# EAGLE board VL6180_Breakout-Panel-v10 (EAGLE 6.5.0), part 1 of 3
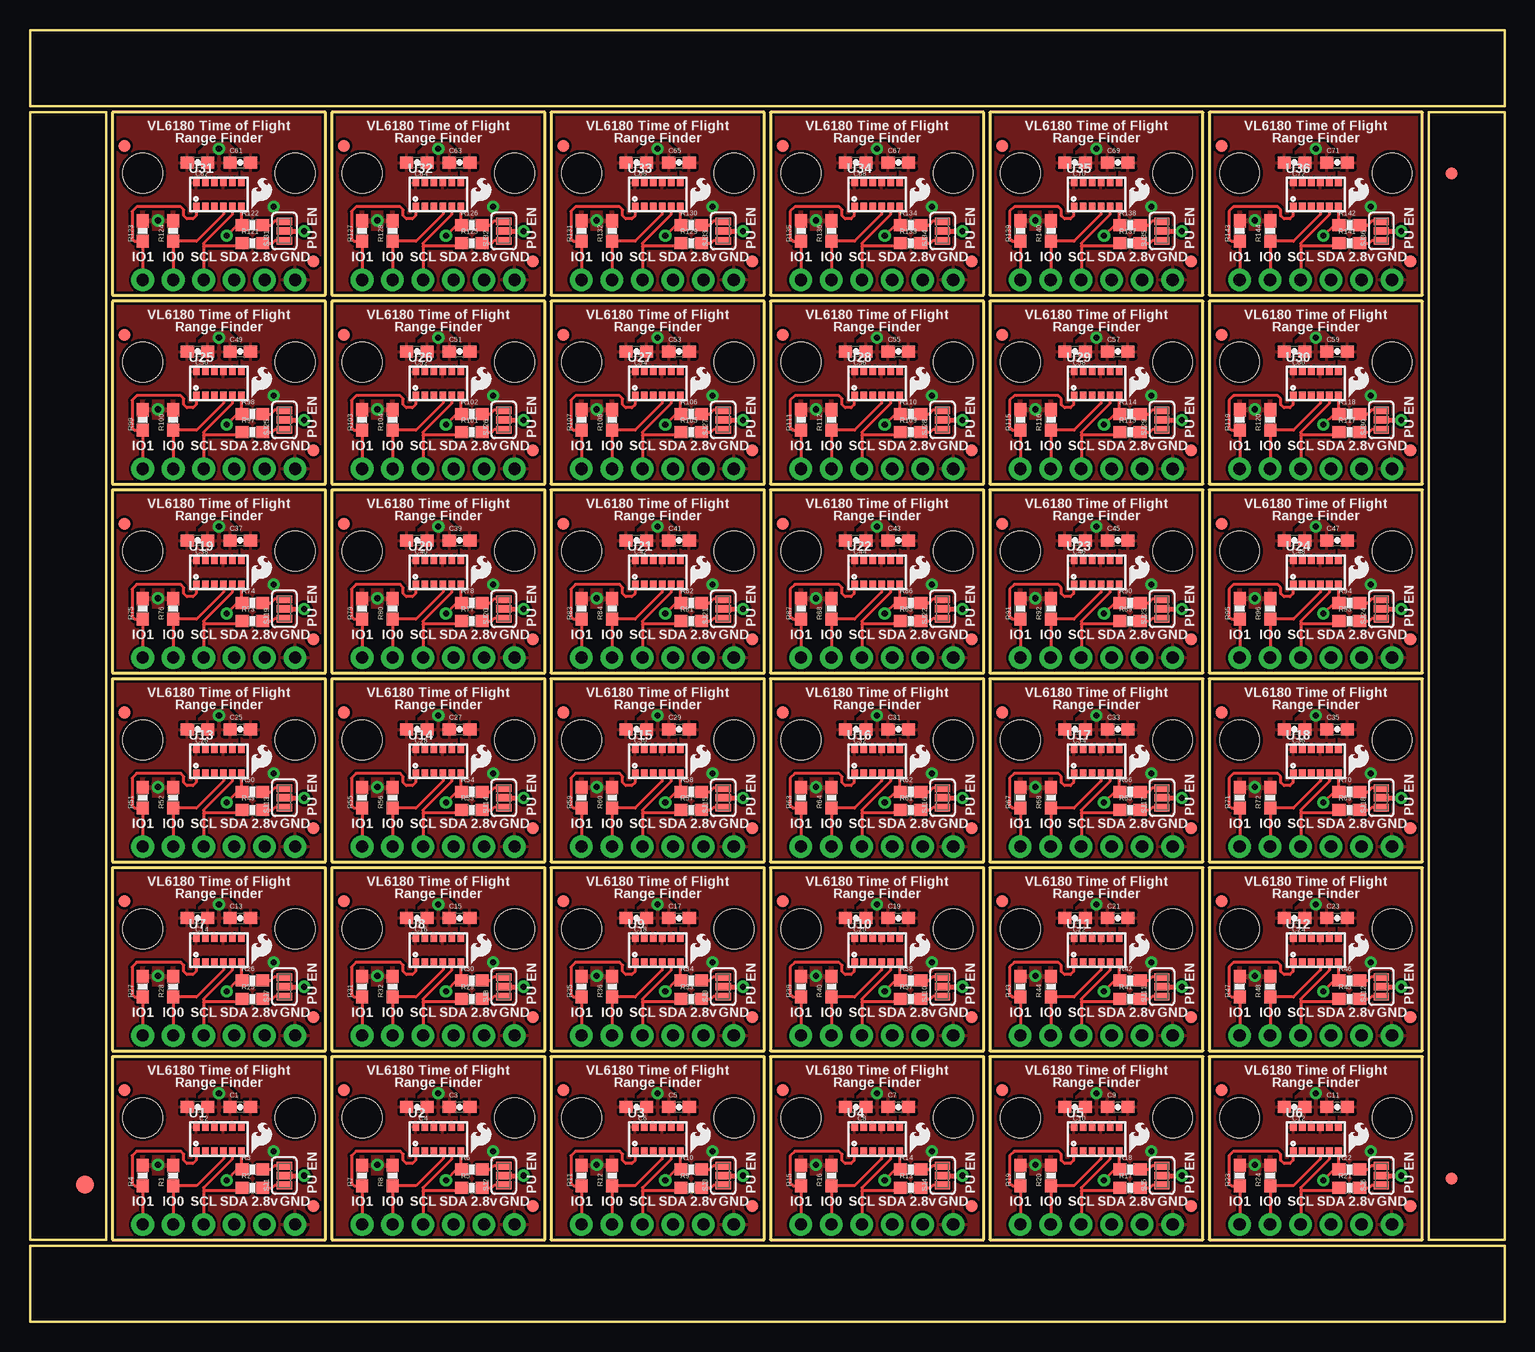
[diagram p0: board, top side]
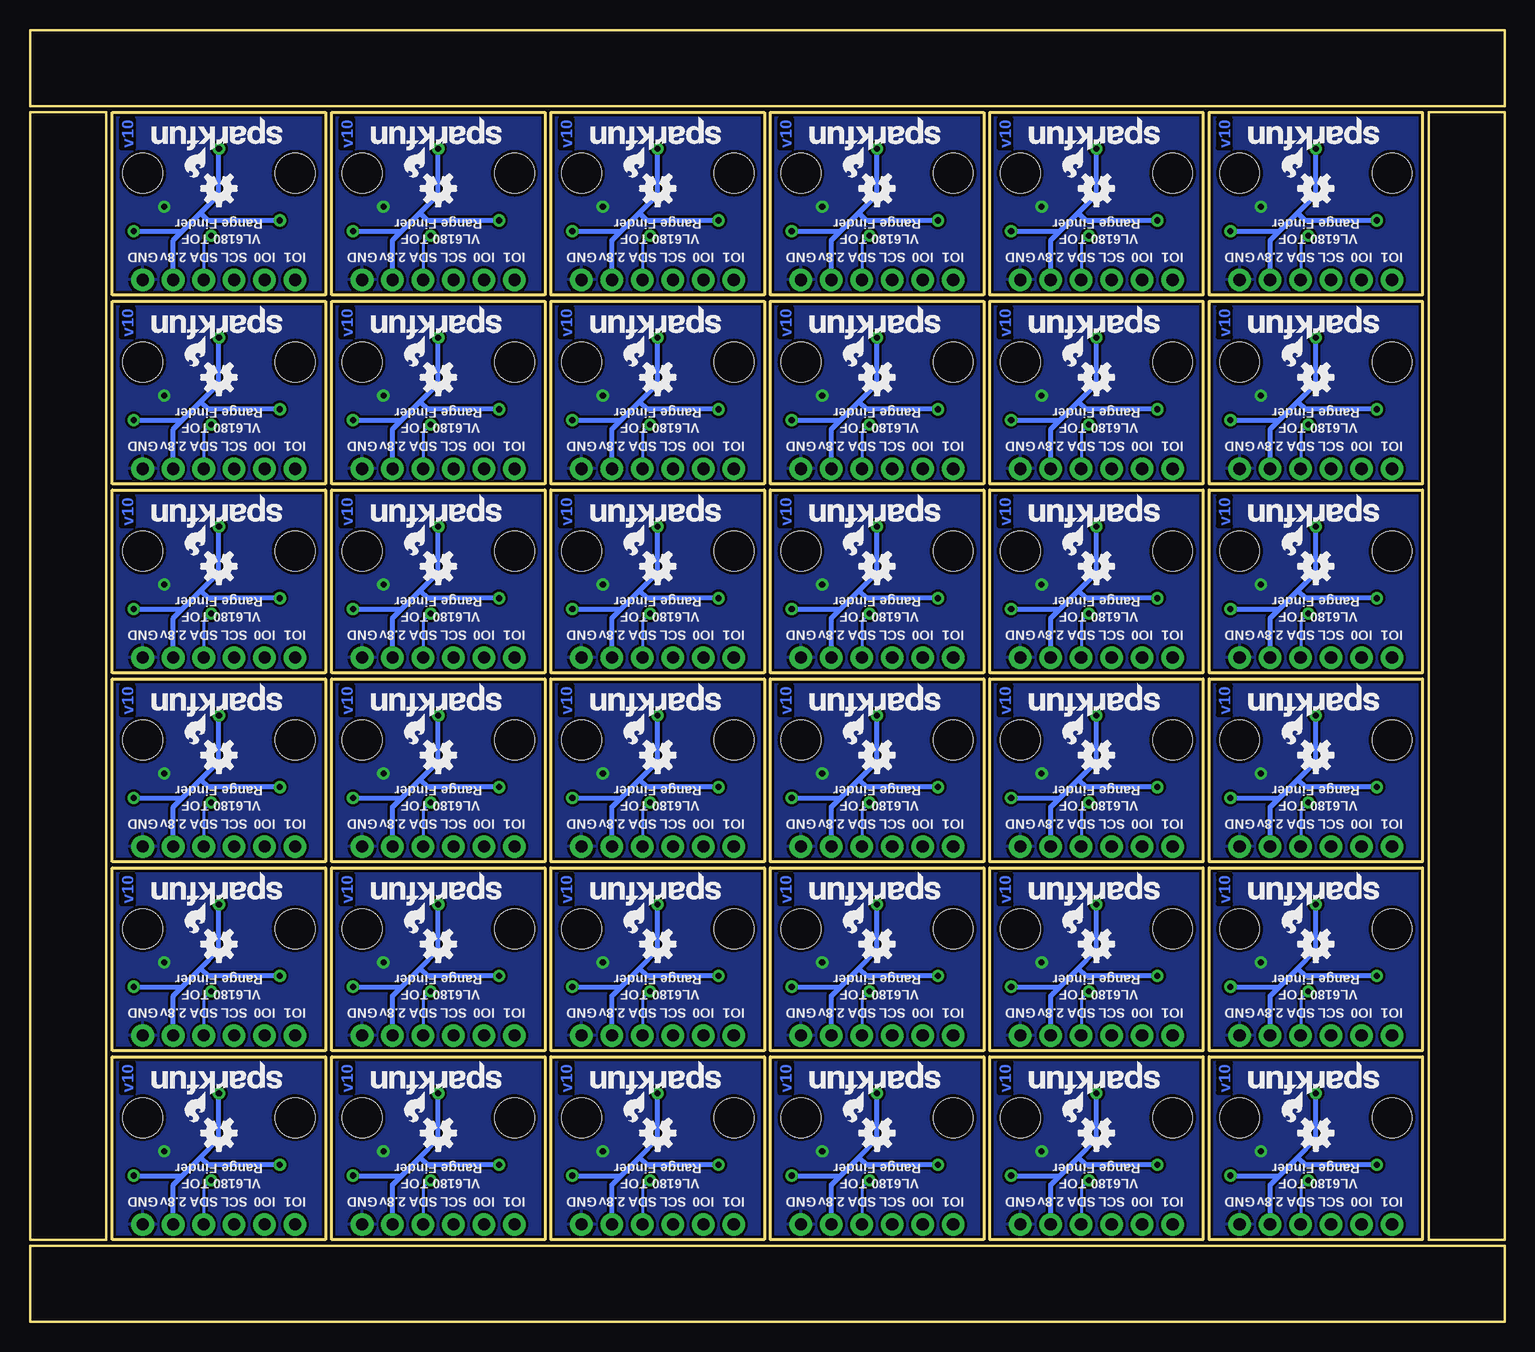
[diagram p1: board, bottom side, seen from below]

Size 122.94 x 107.7 mm. Coordinates in mm from the lower left corner, seen from the top.
Outline: 6.35,79.25 6.35,6.86 0,6.86 0,29.72
Outline: 122.94,79.25 122.94,6.86 116.59,6.86 116.59,29.72
Outline: 116.59,28.45 116.59,100.84 122.94,100.84 122.94,77.98
Outline: 0,28.45 0,100.84 6.35,100.84 6.35,77.98
Outline: 6.86,6.86 24.64,6.86 24.64,22.1 6.86,22.1 6.86,6.86
Outline: 25.15,6.86 42.93,6.86 42.93,22.1 25.15,22.1 25.15,6.86
Outline: 43.43,6.86 61.21,6.86 61.21,22.1 43.43,22.1 43.43,6.86
Outline: 61.72,6.86 79.5,6.86 79.5,22.1 61.72,22.1 61.72,6.86
Outline: 80.01,6.86 97.79,6.86 97.79,22.1 80.01,22.1 80.01,6.86
Outline: 98.3,6.86 116.08,6.86 116.08,22.1 98.3,22.1 98.3,6.86
Outline: 6.86,22.61 24.64,22.61 24.64,37.85 6.86,37.85 6.86,22.61
Outline: 25.15,22.61 42.93,22.61 42.93,37.85 25.15,37.85 25.15,22.61
Outline: 43.43,22.61 61.21,22.61 61.21,37.85 43.43,37.85 43.43,22.61
Outline: 61.72,22.61 79.5,22.61 79.5,37.85 61.72,37.85 61.72,22.61
Outline: 80.01,22.61 97.79,22.61 97.79,37.85 80.01,37.85 80.01,22.61
Outline: 98.3,22.61 116.08,22.61 116.08,37.85 98.3,37.85 98.3,22.61
Outline: 6.86,38.35 24.64,38.35 24.64,53.59 6.86,53.59 6.86,38.35
Outline: 25.15,38.35 42.93,38.35 42.93,53.59 25.15,53.59 25.15,38.35
Outline: 43.43,38.35 61.21,38.35 61.21,53.59 43.43,53.59 43.43,38.35
Outline: 61.72,38.35 79.5,38.35 79.5,53.59 61.72,53.59 61.72,38.35
Outline: 80.01,38.35 97.79,38.35 97.79,53.59 80.01,53.59 80.01,38.35
Outline: 98.3,38.35 116.08,38.35 116.08,53.59 98.3,53.59 98.3,38.35
Outline: 6.86,54.1 24.64,54.1 24.64,69.34 6.86,69.34 6.86,54.1
Outline: 25.15,54.1 42.93,54.1 42.93,69.34 25.15,69.34 25.15,54.1
Outline: 43.43,54.1 61.21,54.1 61.21,69.34 43.43,69.34 43.43,54.1
Outline: 61.72,54.1 79.5,54.1 79.5,69.34 61.72,69.34 61.72,54.1
Outline: 80.01,54.1 97.79,54.1 97.79,69.34 80.01,69.34 80.01,54.1
Outline: 98.3,54.1 116.08,54.1 116.08,69.34 98.3,69.34 98.3,54.1
Outline: 6.86,69.85 24.64,69.85 24.64,85.09 6.86,85.09 6.86,69.85
Outline: 25.15,69.85 42.93,69.85 42.93,85.09 25.15,85.09 25.15,69.85
Outline: 43.43,69.85 61.21,69.85 61.21,85.09 43.43,85.09 43.43,69.85
Outline: 61.72,69.85 79.5,69.85 79.5,85.09 61.72,85.09 61.72,69.85
Outline: 80.01,69.85 97.79,69.85 97.79,85.09 80.01,85.09 80.01,69.85
Outline: 98.3,69.85 116.08,69.85 116.08,85.09 98.3,85.09 98.3,69.85
Outline: 6.86,85.6 24.64,85.6 24.64,100.84 6.86,100.84 6.86,85.6
Outline: 25.15,85.6 42.93,85.6 42.93,100.84 25.15,100.84 25.15,85.6
Outline: 43.43,85.6 61.21,85.6 61.21,100.84 43.43,100.84 43.43,85.6
Outline: 61.72,85.6 79.5,85.6 79.5,100.84 61.72,100.84 61.72,85.6
Outline: 80.01,85.6 97.79,85.6 97.79,100.84 80.01,100.84 80.01,85.6
Outline: 98.3,85.6 116.08,85.6 116.08,100.84 98.3,100.84 98.3,85.6
Outline: 0,0 122.94,0 122.94,6.35 0,6.35 0,0
Outline: 122.94,107.7 0,107.7 0,101.35 122.94,101.35 122.94,107.7
Copper layers (1*16): Top 0.035mm / dielectric 1.5mm / Bottom 0.035mm
Design rules "SparkFun-2-layer": minimum track width 7mil, minimum drill 15mil, track to track 8mil, track to pad 8mil, pad to pad 8mil, via to via 8mil, smd to smd 8mil, copper to edge 8mil, drill to drill 8mil, minimum pad ring 12mil, minimum via ring 10mil, stop-mask expansion 4mil, vias tented up to drill 20mil, thermal gap 10mil

## Footprints (pad centres in the part's own frame; a part is rotated, then mirrored left to right if it is on the bottom)
0603-CAP = smd 1.1 x 1: 1 -0.85,0; 2 0.85,0
FIDUCIAL-1.5X3 = smd 1.5 x 1.5: 1 0,0
FIDUCIAL-1X2 = smd 1 x 1: 1 0,0
1X06 = drill 1.016 pad 1.88: 1 0,0; 2 2.54,0; 3 5.08,0; 4 7.62,0; 5 10.16,0; 6 12.7,0
0603-RES = smd 1.1 x 1: 1 -0.85,0; 2 0.85,0
PAD-JUMPER-3-NC_BY_PASTE_YES_SILK_FULL_BOX = smd 0.635 x 1.27: 1 -0.813,0; 2 0,0; 3 0.813,0
STAND-OFF = hole 3.302: 0,0
VL6180 = smd 0.55 x 0.6: 1 -1.875,-1; 2 -1.125,-1; 3 -0.375,-1; 4 0.375,-1; 5 1.125,-1; 6 1.875,-1; 7 1.875,1; 8 1.125,1; 9 0.375,1; 10 -0.375,1; 11 -1.125,1; 12 -1.875,1

## Placement (x,y rotation side)
C1  4.7uF  [0603-CAP]  17.53,17.91 0 top
C2  0.1uF  [0603-CAP]  13.97,17.91 180 top
C3  4.7uF  [0603-CAP]  35.81,17.91 0 top
C4  0.1uF  [0603-CAP]  32.26,17.91 180 top
C5  4.7uF  [0603-CAP]  54.1,17.91 0 top
C6  0.1uF  [0603-CAP]  50.55,17.91 180 top
C7  4.7uF  [0603-CAP]  72.39,17.91 0 top
C8  0.1uF  [0603-CAP]  68.83,17.91 180 top
C9  4.7uF  [0603-CAP]  90.68,17.91 0 top
C10  0.1uF  [0603-CAP]  87.12,17.91 180 top
C11  4.7uF  [0603-CAP]  108.97,17.91 0 top
C12  0.1uF  [0603-CAP]  105.41,17.91 180 top
C13  4.7uF  [0603-CAP]  17.53,33.66 0 top
C14  0.1uF  [0603-CAP]  13.97,33.66 180 top
C15  4.7uF  [0603-CAP]  35.81,33.66 0 top
C16  0.1uF  [0603-CAP]  32.26,33.66 180 top
C17  4.7uF  [0603-CAP]  54.1,33.66 0 top
C18  0.1uF  [0603-CAP]  50.55,33.66 180 top
C19  4.7uF  [0603-CAP]  72.39,33.66 0 top
C20  0.1uF  [0603-CAP]  68.83,33.66 180 top
C21  4.7uF  [0603-CAP]  90.68,33.66 0 top
C22  0.1uF  [0603-CAP]  87.12,33.66 180 top
C23  4.7uF  [0603-CAP]  108.97,33.66 0 top
C24  0.1uF  [0603-CAP]  105.41,33.66 180 top
C25  4.7uF  [0603-CAP]  17.53,49.4 0 top
C26  0.1uF  [0603-CAP]  13.97,49.4 180 top
C27  4.7uF  [0603-CAP]  35.81,49.4 0 top
C28  0.1uF  [0603-CAP]  32.26,49.4 180 top
C29  4.7uF  [0603-CAP]  54.1,49.4 0 top
C30  0.1uF  [0603-CAP]  50.55,49.4 180 top
C31  4.7uF  [0603-CAP]  72.39,49.4 0 top
C32  0.1uF  [0603-CAP]  68.83,49.4 180 top
C33  4.7uF  [0603-CAP]  90.68,49.4 0 top
C34  0.1uF  [0603-CAP]  87.12,49.4 180 top
C35  4.7uF  [0603-CAP]  108.97,49.4 0 top
C36  0.1uF  [0603-CAP]  105.41,49.4 180 top
C37  4.7uF  [0603-CAP]  17.53,65.15 0 top
C38  0.1uF  [0603-CAP]  13.97,65.15 180 top
C39  4.7uF  [0603-CAP]  35.81,65.15 0 top
C40  0.1uF  [0603-CAP]  32.26,65.15 180 top
C41  4.7uF  [0603-CAP]  54.1,65.15 0 top
C42  0.1uF  [0603-CAP]  50.55,65.15 180 top
C43  4.7uF  [0603-CAP]  72.39,65.15 0 top
C44  0.1uF  [0603-CAP]  68.83,65.15 180 top
C45  4.7uF  [0603-CAP]  90.68,65.15 0 top
C46  0.1uF  [0603-CAP]  87.12,65.15 180 top
C47  4.7uF  [0603-CAP]  108.97,65.15 0 top
C48  0.1uF  [0603-CAP]  105.41,65.15 180 top
C49  4.7uF  [0603-CAP]  17.53,80.9 0 top
C50  0.1uF  [0603-CAP]  13.97,80.9 180 top
C51  4.7uF  [0603-CAP]  35.81,80.9 0 top
C52  0.1uF  [0603-CAP]  32.26,80.9 180 top
C53  4.7uF  [0603-CAP]  54.1,80.9 0 top
C54  0.1uF  [0603-CAP]  50.55,80.9 180 top
C55  4.7uF  [0603-CAP]  72.39,80.9 0 top
C56  0.1uF  [0603-CAP]  68.83,80.9 180 top
C57  4.7uF  [0603-CAP]  90.68,80.9 0 top
C58  0.1uF  [0603-CAP]  87.12,80.9 180 top
C59  4.7uF  [0603-CAP]  108.97,80.9 0 top
C60  0.1uF  [0603-CAP]  105.41,80.9 180 top
C61  4.7uF  [0603-CAP]  17.53,96.65 0 top
C62  0.1uF  [0603-CAP]  13.97,96.65 180 top
C63  4.7uF  [0603-CAP]  35.81,96.65 0 top
C64  0.1uF  [0603-CAP]  32.26,96.65 180 top
C65  4.7uF  [0603-CAP]  54.1,96.65 0 top
C66  0.1uF  [0603-CAP]  50.55,96.65 180 top
C67  4.7uF  [0603-CAP]  72.39,96.65 0 top
C68  0.1uF  [0603-CAP]  68.83,96.65 180 top
C69  4.7uF  [0603-CAP]  90.68,96.65 0 top
C70  0.1uF  [0603-CAP]  87.12,96.65 180 top
C71  4.7uF  [0603-CAP]  108.97,96.65 0 top
C72  0.1uF  [0603-CAP]  105.41,96.65 180 top
E$1  [FIDUCIAL-1.5X3]  4.57,11.43 0 top
E$4  [FIDUCIAL-1X2]  118.49,11.94 0 top
E$6  [FIDUCIAL-1X2]  118.49,95.76 180 top
FID1  FIDUCIAL1X2  [FIDUCIAL-1X2]  23.62,9.65 0 top
FID2  FIDUCIAL1X2  [FIDUCIAL-1X2]  7.87,19.3 0 top
FID3  FIDUCIAL1X2  [FIDUCIAL-1X2]  41.91,9.65 0 top
FID4  FIDUCIAL1X2  [FIDUCIAL-1X2]  26.16,19.3 0 top
FID5  FIDUCIAL1X2  [FIDUCIAL-1X2]  60.2,9.65 0 top
FID6  FIDUCIAL1X2  [FIDUCIAL-1X2]  44.45,19.3 0 top
FID7  FIDUCIAL1X2  [FIDUCIAL-1X2]  78.49,9.65 0 top
FID8  FIDUCIAL1X2  [FIDUCIAL-1X2]  62.74,19.3 0 top
FID9  FIDUCIAL1X2  [FIDUCIAL-1X2]  96.77,9.65 0 top
FID10  FIDUCIAL1X2  [FIDUCIAL-1X2]  81.03,19.3 0 top
FID11  FIDUCIAL1X2  [FIDUCIAL-1X2]  115.06,9.65 0 top
FID12  FIDUCIAL1X2  [FIDUCIAL-1X2]  99.31,19.3 0 top
FID13  FIDUCIAL1X2  [FIDUCIAL-1X2]  23.62,25.4 0 top
FID14  FIDUCIAL1X2  [FIDUCIAL-1X2]  7.87,35.05 0 top
FID15  FIDUCIAL1X2  [FIDUCIAL-1X2]  41.91,25.4 0 top
FID16  FIDUCIAL1X2  [FIDUCIAL-1X2]  26.16,35.05 0 top
FID17  FIDUCIAL1X2  [FIDUCIAL-1X2]  60.2,25.4 0 top
FID18  FIDUCIAL1X2  [FIDUCIAL-1X2]  44.45,35.05 0 top
FID19  FIDUCIAL1X2  [FIDUCIAL-1X2]  78.49,25.4 0 top
FID20  FIDUCIAL1X2  [FIDUCIAL-1X2]  62.74,35.05 0 top
FID21  FIDUCIAL1X2  [FIDUCIAL-1X2]  96.77,25.4 0 top
FID22  FIDUCIAL1X2  [FIDUCIAL-1X2]  81.03,35.05 0 top
FID23  FIDUCIAL1X2  [FIDUCIAL-1X2]  115.06,25.4 0 top
FID24  FIDUCIAL1X2  [FIDUCIAL-1X2]  99.31,35.05 0 top
FID25  FIDUCIAL1X2  [FIDUCIAL-1X2]  23.62,41.15 0 top
FID26  FIDUCIAL1X2  [FIDUCIAL-1X2]  7.87,50.8 0 top
FID27  FIDUCIAL1X2  [FIDUCIAL-1X2]  41.91,41.15 0 top
FID28  FIDUCIAL1X2  [FIDUCIAL-1X2]  26.16,50.8 0 top
FID29  FIDUCIAL1X2  [FIDUCIAL-1X2]  60.2,41.15 0 top
FID30  FIDUCIAL1X2  [FIDUCIAL-1X2]  44.45,50.8 0 top
FID31  FIDUCIAL1X2  [FIDUCIAL-1X2]  78.49,41.15 0 top
FID32  FIDUCIAL1X2  [FIDUCIAL-1X2]  62.74,50.8 0 top
FID33  FIDUCIAL1X2  [FIDUCIAL-1X2]  96.77,41.15 0 top
FID34  FIDUCIAL1X2  [FIDUCIAL-1X2]  81.03,50.8 0 top
FID35  FIDUCIAL1X2  [FIDUCIAL-1X2]  115.06,41.15 0 top
FID36  FIDUCIAL1X2  [FIDUCIAL-1X2]  99.31,50.8 0 top
FID37  FIDUCIAL1X2  [FIDUCIAL-1X2]  23.62,56.9 0 top
FID38  FIDUCIAL1X2  [FIDUCIAL-1X2]  7.87,66.55 0 top
FID39  FIDUCIAL1X2  [FIDUCIAL-1X2]  41.91,56.9 0 top
FID40  FIDUCIAL1X2  [FIDUCIAL-1X2]  26.16,66.55 0 top
FID41  FIDUCIAL1X2  [FIDUCIAL-1X2]  60.2,56.9 0 top
FID42  FIDUCIAL1X2  [FIDUCIAL-1X2]  44.45,66.55 0 top
FID43  FIDUCIAL1X2  [FIDUCIAL-1X2]  78.49,56.9 0 top
FID44  FIDUCIAL1X2  [FIDUCIAL-1X2]  62.74,66.55 0 top
FID45  FIDUCIAL1X2  [FIDUCIAL-1X2]  96.77,56.9 0 top
FID46  FIDUCIAL1X2  [FIDUCIAL-1X2]  81.03,66.55 0 top
FID47  FIDUCIAL1X2  [FIDUCIAL-1X2]  115.06,56.9 0 top
FID48  FIDUCIAL1X2  [FIDUCIAL-1X2]  99.31,66.55 0 top
FID49  FIDUCIAL1X2  [FIDUCIAL-1X2]  23.62,72.64 0 top
FID50  FIDUCIAL1X2  [FIDUCIAL-1X2]  7.87,82.3 0 top
FID51  FIDUCIAL1X2  [FIDUCIAL-1X2]  41.91,72.64 0 top
FID52  FIDUCIAL1X2  [FIDUCIAL-1X2]  26.16,82.3 0 top
FID53  FIDUCIAL1X2  [FIDUCIAL-1X2]  60.2,72.64 0 top
FID54  FIDUCIAL1X2  [FIDUCIAL-1X2]  44.45,82.3 0 top
FID55  FIDUCIAL1X2  [FIDUCIAL-1X2]  78.49,72.64 0 top
FID56  FIDUCIAL1X2  [FIDUCIAL-1X2]  62.74,82.3 0 top
FID57  FIDUCIAL1X2  [FIDUCIAL-1X2]  96.77,72.64 0 top
FID58  FIDUCIAL1X2  [FIDUCIAL-1X2]  81.03,82.3 0 top
FID59  FIDUCIAL1X2  [FIDUCIAL-1X2]  115.06,72.64 0 top
FID60  FIDUCIAL1X2  [FIDUCIAL-1X2]  99.31,82.3 0 top
FID61  FIDUCIAL1X2  [FIDUCIAL-1X2]  23.62,88.39 0 top
FID62  FIDUCIAL1X2  [FIDUCIAL-1X2]  7.87,98.04 0 top
FID63  FIDUCIAL1X2  [FIDUCIAL-1X2]  41.91,88.39 0 top
FID64  FIDUCIAL1X2  [FIDUCIAL-1X2]  26.16,98.04 0 top
FID65  FIDUCIAL1X2  [FIDUCIAL-1X2]  60.2,88.39 0 top
FID66  FIDUCIAL1X2  [FIDUCIAL-1X2]  44.45,98.04 0 top
FID67  FIDUCIAL1X2  [FIDUCIAL-1X2]  78.49,88.39 0 top
FID68  FIDUCIAL1X2  [FIDUCIAL-1X2]  62.74,98.04 0 top
FID69  FIDUCIAL1X2  [FIDUCIAL-1X2]  96.77,88.39 0 top
FID70  FIDUCIAL1X2  [FIDUCIAL-1X2]  81.03,98.04 0 top
FID71  FIDUCIAL1X2  [FIDUCIAL-1X2]  115.06,88.39 0 top
FID72  FIDUCIAL1X2  [FIDUCIAL-1X2]  99.31,98.04 0 top
JP1  [1X06]  22.1,8.13 180 top
JP2  [1X06]  40.39,8.13 180 top
JP3  [1X06]  58.67,8.13 180 top
JP4  [1X06]  76.96,8.13 180 top
JP5  [1X06]  95.25,8.13 180 top
JP6  [1X06]  113.54,8.13 180 top
JP7  [1X06]  22.1,23.88 180 top
JP8  [1X06]  40.39,23.88 180 top
JP9  [1X06]  58.67,23.88 180 top
JP10  [1X06]  76.96,23.88 180 top
JP11  [1X06]  95.25,23.88 180 top
JP12  [1X06]  113.54,23.88 180 top
JP13  [1X06]  22.1,39.62 180 top
JP14  [1X06]  40.39,39.62 180 top
JP15  [1X06]  58.67,39.62 180 top
JP16  [1X06]  76.96,39.62 180 top
JP17  [1X06]  95.25,39.62 180 top
JP18  [1X06]  113.54,39.62 180 top
JP19  [1X06]  22.1,55.37 180 top
JP20  [1X06]  40.39,55.37 180 top
JP21  [1X06]  58.67,55.37 180 top
JP22  [1X06]  76.96,55.37 180 top
JP23  [1X06]  95.25,55.37 180 top
JP24  [1X06]  113.54,55.37 180 top
JP25  [1X06]  22.1,71.12 180 top
JP26  [1X06]  40.39,71.12 180 top
JP27  [1X06]  58.67,71.12 180 top
JP28  [1X06]  76.96,71.12 180 top
JP29  [1X06]  95.25,71.12 180 top
JP30  [1X06]  113.54,71.12 180 top
JP31  [1X06]  22.1,86.87 180 top
JP32  [1X06]  40.39,86.87 180 top
JP33  [1X06]  58.67,86.87 180 top
JP34  [1X06]  76.96,86.87 180 top
JP35  [1X06]  95.25,86.87 180 top
JP36  [1X06]  113.54,86.87 180 top
LOGO1  SFE_LOGO_NAME_FLAME.1_INCH  [SFE_LOGO_NAME_FLAME_.1]  10.03,21.84 180 bottom
LOGO2  OSHW-LOGOS  [OSHW-LOGO-S]  15.75,15.75 180 bottom
LOGO3  SFE_LOGO_NAME_FLAME.1_INCH  [SFE_LOGO_NAME_FLAME_.1]  28.32,21.84 180 bottom
LOGO4  OSHW-LOGOS  [OSHW-LOGO-S]  34.04,15.75 180 bottom
LOGO5  SFE_LOGO_NAME_FLAME.1_INCH  [SFE_LOGO_NAME_FLAME_.1]  46.61,21.84 180 bottom
LOGO6  OSHW-LOGOS  [OSHW-LOGO-S]  52.32,15.75 180 bottom
LOGO7  SFE_LOGO_NAME_FLAME.1_INCH  [SFE_LOGO_NAME_FLAME_.1]  64.9,21.84 180 bottom
LOGO8  OSHW-LOGOS  [OSHW-LOGO-S]  70.61,15.75 180 bottom
LOGO9  SFE_LOGO_NAME_FLAME.1_INCH  [SFE_LOGO_NAME_FLAME_.1]  83.19,21.84 180 bottom
LOGO10  OSHW-LOGOS  [OSHW-LOGO-S]  88.9,15.75 180 bottom
LOGO11  SFE_LOGO_NAME_FLAME.1_INCH  [SFE_LOGO_NAME_FLAME_.1]  101.47,21.84 180 bottom
LOGO12  OSHW-LOGOS  [OSHW-LOGO-S]  107.19,15.75 180 bottom
LOGO13  SFE_LOGO_NAME_FLAME.1_INCH  [SFE_LOGO_NAME_FLAME_.1]  10.03,37.59 180 bottom
LOGO14  OSHW-LOGOS  [OSHW-LOGO-S]  15.75,31.5 180 bottom
LOGO15  SFE_LOGO_NAME_FLAME.1_INCH  [SFE_LOGO_NAME_FLAME_.1]  28.32,37.59 180 bottom
LOGO16  OSHW-LOGOS  [OSHW-LOGO-S]  34.04,31.5 180 bottom
LOGO17  SFE_LOGO_NAME_FLAME.1_INCH  [SFE_LOGO_NAME_FLAME_.1]  46.61,37.59 180 bottom
LOGO18  OSHW-LOGOS  [OSHW-LOGO-S]  52.32,31.5 180 bottom
LOGO19  SFE_LOGO_NAME_FLAME.1_INCH  [SFE_LOGO_NAME_FLAME_.1]  64.9,37.59 180 bottom
LOGO20  OSHW-LOGOS  [OSHW-LOGO-S]  70.61,31.5 180 bottom
LOGO21  SFE_LOGO_NAME_FLAME.1_INCH  [SFE_LOGO_NAME_FLAME_.1]  83.19,37.59 180 bottom
LOGO22  OSHW-LOGOS  [OSHW-LOGO-S]  88.9,31.5 180 bottom
LOGO23  SFE_LOGO_NAME_FLAME.1_INCH  [SFE_LOGO_NAME_FLAME_.1]  101.47,37.59 180 bottom
LOGO24  OSHW-LOGOS  [OSHW-LOGO-S]  107.19,31.5 180 bottom
LOGO25  SFE_LOGO_NAME_FLAME.1_INCH  [SFE_LOGO_NAME_FLAME_.1]  10.03,53.34 180 bottom
LOGO26  OSHW-LOGOS  [OSHW-LOGO-S]  15.75,47.24 180 bottom
LOGO27  SFE_LOGO_NAME_FLAME.1_INCH  [SFE_LOGO_NAME_FLAME_.1]  28.32,53.34 180 bottom
LOGO28  OSHW-LOGOS  [OSHW-LOGO-S]  34.04,47.24 180 bottom
LOGO29  SFE_LOGO_NAME_FLAME.1_INCH  [SFE_LOGO_NAME_FLAME_.1]  46.61,53.34 180 bottom
LOGO30  OSHW-LOGOS  [OSHW-LOGO-S]  52.32,47.24 180 bottom
LOGO31  SFE_LOGO_NAME_FLAME.1_INCH  [SFE_LOGO_NAME_FLAME_.1]  64.9,53.34 180 bottom
LOGO32  OSHW-LOGOS  [OSHW-LOGO-S]  70.61,47.24 180 bottom
LOGO33  SFE_LOGO_NAME_FLAME.1_INCH  [SFE_LOGO_NAME_FLAME_.1]  83.19,53.34 180 bottom
LOGO34  OSHW-LOGOS  [OSHW-LOGO-S]  88.9,47.24 180 bottom
LOGO35  SFE_LOGO_NAME_FLAME.1_INCH  [SFE_LOGO_NAME_FLAME_.1]  101.47,53.34 180 bottom
LOGO36  OSHW-LOGOS  [OSHW-LOGO-S]  107.19,47.24 180 bottom
LOGO37  SFE_LOGO_NAME_FLAME.1_INCH  [SFE_LOGO_NAME_FLAME_.1]  10.03,69.09 180 bottom
LOGO38  OSHW-LOGOS  [OSHW-LOGO-S]  15.75,62.99 180 bottom
LOGO39  SFE_LOGO_NAME_FLAME.1_INCH  [SFE_LOGO_NAME_FLAME_.1]  28.32,69.09 180 bottom
LOGO40  OSHW-LOGOS  [OSHW-LOGO-S]  34.04,62.99 180 bottom
LOGO41  SFE_LOGO_NAME_FLAME.1_INCH  [SFE_LOGO_NAME_FLAME_.1]  46.61,69.09 180 bottom
LOGO42  OSHW-LOGOS  [OSHW-LOGO-S]  52.32,62.99 180 bottom
LOGO43  SFE_LOGO_NAME_FLAME.1_INCH  [SFE_LOGO_NAME_FLAME_.1]  64.9,69.09 180 bottom
LOGO44  OSHW-LOGOS  [OSHW-LOGO-S]  70.61,62.99 180 bottom
LOGO45  SFE_LOGO_NAME_FLAME.1_INCH  [SFE_LOGO_NAME_FLAME_.1]  83.19,69.09 180 bottom
LOGO46  OSHW-LOGOS  [OSHW-LOGO-S]  88.9,62.99 180 bottom
LOGO47  SFE_LOGO_NAME_FLAME.1_INCH  [SFE_LOGO_NAME_FLAME_.1]  101.47,69.09 180 bottom
LOGO48  OSHW-LOGOS  [OSHW-LOGO-S]  107.19,62.99 180 bottom
LOGO49  SFE_LOGO_NAME_FLAME.1_INCH  [SFE_LOGO_NAME_FLAME_.1]  10.03,84.84 180 bottom
LOGO50  OSHW-LOGOS  [OSHW-LOGO-S]  15.75,78.74 180 bottom
LOGO51  SFE_LOGO_NAME_FLAME.1_INCH  [SFE_LOGO_NAME_FLAME_.1]  28.32,84.84 180 bottom
LOGO52  OSHW-LOGOS  [OSHW-LOGO-S]  34.04,78.74 180 bottom
LOGO53  SFE_LOGO_NAME_FLAME.1_INCH  [SFE_LOGO_NAME_FLAME_.1]  46.61,84.84 180 bottom
LOGO54  OSHW-LOGOS  [OSHW-LOGO-S]  52.32,78.74 180 bottom
LOGO55  SFE_LOGO_NAME_FLAME.1_INCH  [SFE_LOGO_NAME_FLAME_.1]  64.9,84.84 180 bottom
LOGO56  OSHW-LOGOS  [OSHW-LOGO-S]  70.61,78.74 180 bottom
LOGO57  SFE_LOGO_NAME_FLAME.1_INCH  [SFE_LOGO_NAME_FLAME_.1]  83.19,84.84 180 bottom
LOGO58  OSHW-LOGOS  [OSHW-LOGO-S]  88.9,78.74 180 bottom
LOGO59  SFE_LOGO_NAME_FLAME.1_INCH  [SFE_LOGO_NAME_FLAME_.1]  101.47,84.84 180 bottom
LOGO60  OSHW-LOGOS  [OSHW-LOGO-S]  107.19,78.74 180 bottom
LOGO61  SFE_LOGO_NAME_FLAME.1_INCH  [SFE_LOGO_NAME_FLAME_.1]  10.03,100.58 180 bottom
LOGO62  OSHW-LOGOS  [OSHW-LOGO-S]  15.75,94.49 180 bottom
LOGO63  SFE_LOGO_NAME_FLAME.1_INCH  [SFE_LOGO_NAME_FLAME_.1]  28.32,100.58 180 bottom
LOGO64  OSHW-LOGOS  [OSHW-LOGO-S]  34.04,94.49 180 bottom
LOGO65  SFE_LOGO_NAME_FLAME.1_INCH  [SFE_LOGO_NAME_FLAME_.1]  46.61,100.58 180 bottom
LOGO66  OSHW-LOGOS  [OSHW-LOGO-S]  52.32,94.49 180 bottom
LOGO67  SFE_LOGO_NAME_FLAME.1_INCH  [SFE_LOGO_NAME_FLAME_.1]  64.9,100.58 180 bottom
LOGO68  OSHW-LOGOS  [OSHW-LOGO-S]  70.61,94.49 180 bottom
LOGO69  SFE_LOGO_NAME_FLAME.1_INCH  [SFE_LOGO_NAME_FLAME_.1]  83.19,100.58 180 bottom
LOGO70  OSHW-LOGOS  [OSHW-LOGO-S]  88.9,94.49 180 bottom
LOGO71  SFE_LOGO_NAME_FLAME.1_INCH  [SFE_LOGO_NAME_FLAME_.1]  101.47,100.58 180 bottom
LOGO72  OSHW-LOGOS  [OSHW-LOGO-S]  107.19,94.49 180 bottom
R1  47K  [0603-RES]  11.94,12.19 90 top
R2  2.2k  [0603-RES]  18.54,11.18 0 top
R3  2.2k  [0603-RES]  18.54,12.7 0 top
R4  47K  [0603-RES]  9.4,12.19 90 top
R5  2.2k  [0603-RES]  36.83,11.18 0 top
R6  2.2k  [0603-RES]  36.83,12.7 0 top
R7  47K  [0603-RES]  27.69,12.19 90 top
R8  47K  [0603-RES]  30.23,12.19 90 top
R9  2.2k  [0603-RES]  55.12,11.18 0 top
R10  2.2k  [0603-RES]  55.12,12.7 0 top
R11  47K  [0603-RES]  45.97,12.19 90 top
R12  47K  [0603-RES]  48.51,12.19 90 top
R13  2.2k  [0603-RES]  73.41,11.18 0 top
R14  2.2k  [0603-RES]  73.41,12.7 0 top
R15  47K  [0603-RES]  64.26,12.19 90 top
R16  47K  [0603-RES]  66.8,12.19 90 top
R17  2.2k  [0603-RES]  91.69,11.18 0 top
R18  2.2k  [0603-RES]  91.69,12.7 0 top
R19  47K  [0603-RES]  82.55,12.19 90 top
R20  47K  [0603-RES]  85.09,12.19 90 top
R21  2.2k  [0603-RES]  109.98,11.18 0 top
R22  2.2k  [0603-RES]  109.98,12.7 0 top
R23  47K  [0603-RES]  100.84,12.19 90 top
R24  47K  [0603-RES]  103.38,12.19 90 top
R25  2.2k  [0603-RES]  18.54,26.92 0 top
R26  2.2k  [0603-RES]  18.54,28.45 0 top
R27  47K  [0603-RES]  9.4,27.94 90 top
R28  47K  [0603-RES]  11.94,27.94 90 top
R29  2.2k  [0603-RES]  36.83,26.92 0 top
R30  2.2k  [0603-RES]  36.83,28.45 0 top
R31  47K  [0603-RES]  27.69,27.94 90 top
R32  47K  [0603-RES]  30.23,27.94 90 top
R33  2.2k  [0603-RES]  55.12,26.92 0 top
R34  2.2k  [0603-RES]  55.12,28.45 0 top
R35  47K  [0603-RES]  45.97,27.94 90 top
R36  47K  [0603-RES]  48.51,27.94 90 top
R37  2.2k  [0603-RES]  73.41,26.92 0 top
R38  2.2k  [0603-RES]  73.41,28.45 0 top
R39  47K  [0603-RES]  64.26,27.94 90 top
R40  47K  [0603-RES]  66.8,27.94 90 top
R41  2.2k  [0603-RES]  91.69,26.92 0 top
R42  2.2k  [0603-RES]  91.69,28.45 0 top
R43  47K  [0603-RES]  82.55,27.94 90 top
R44  47K  [0603-RES]  85.09,27.94 90 top
R45  2.2k  [0603-RES]  109.98,26.92 0 top
R46  2.2k  [0603-RES]  109.98,28.45 0 top
R47  47K  [0603-RES]  100.84,27.94 90 top
R48  47K  [0603-RES]  103.38,27.94 90 top
R49  2.2k  [0603-RES]  18.54,42.67 0 top
R50  2.2k  [0603-RES]  18.54,44.2 0 top
R51  47K  [0603-RES]  9.4,43.69 90 top
R52  47K  [0603-RES]  11.94,43.69 90 top
R53  2.2k  [0603-RES]  36.83,42.67 0 top
R54  2.2k  [0603-RES]  36.83,44.2 0 top
R55  47K  [0603-RES]  27.69,43.69 90 top
R56  47K  [0603-RES]  30.23,43.69 90 top
R57  2.2k  [0603-RES]  55.12,42.67 0 top
R58  2.2k  [0603-RES]  55.12,44.2 0 top
R59  47K  [0603-RES]  45.97,43.69 90 top
R60  47K  [0603-RES]  48.51,43.69 90 top
R61  2.2k  [0603-RES]  73.41,42.67 0 top
R62  2.2k  [0603-RES]  73.41,44.2 0 top
R63  47K  [0603-RES]  64.26,43.69 90 top
R64  47K  [0603-RES]  66.8,43.69 90 top
R65  2.2k  [0603-RES]  91.69,42.67 0 top
R66  2.2k  [0603-RES]  91.69,44.2 0 top
R67  47K  [0603-RES]  82.55,43.69 90 top
R68  47K  [0603-RES]  85.09,43.69 90 top
R69  2.2k  [0603-RES]  109.98,42.67 0 top
R70  2.2k  [0603-RES]  109.98,44.2 0 top
R71  47K  [0603-RES]  100.84,43.69 90 top
R72  47K  [0603-RES]  103.38,43.69 90 top
R73  2.2k  [0603-RES]  18.54,58.42 0 top
R74  2.2k  [0603-RES]  18.54,59.94 0 top
R75  47K  [0603-RES]  9.4,59.44 90 top
R76  47K  [0603-RES]  11.94,59.44 90 top
R77  2.2k  [0603-RES]  36.83,58.42 0 top
R78  2.2k  [0603-RES]  36.83,59.94 0 top
R79  47K  [0603-RES]  27.69,59.44 90 top
R80  47K  [0603-RES]  30.23,59.44 90 top
R81  2.2k  [0603-RES]  55.12,58.42 0 top
R82  2.2k  [0603-RES]  55.12,59.94 0 top
R83  47K  [0603-RES]  45.97,59.44 90 top
R84  47K  [0603-RES]  48.51,59.44 90 top
R85  2.2k  [0603-RES]  73.41,58.42 0 top
R86  2.2k  [0603-RES]  73.41,59.94 0 top
R87  47K  [0603-RES]  64.26,59.44 90 top
R88  47K  [0603-RES]  66.8,59.44 90 top
R89  2.2k  [0603-RES]  91.69,58.42 0 top
R90  2.2k  [0603-RES]  91.69,59.94 0 top
R91  47K  [0603-RES]  82.55,59.44 90 top
R92  47K  [0603-RES]  85.09,59.44 90 top
R93  2.2k  [0603-RES]  109.98,58.42 0 top
R94  2.2k  [0603-RES]  109.98,59.94 0 top
R95  47K  [0603-RES]  100.84,59.44 90 top
R96  47K  [0603-RES]  103.38,59.44 90 top
R97  2.2k  [0603-RES]  18.54,74.17 0 top
R98  2.2k  [0603-RES]  18.54,75.69 0 top
R99  47K  [0603-RES]  9.4,75.18 90 top
R100  47K  [0603-RES]  11.94,75.18 90 top
R101  2.2k  [0603-RES]  36.83,74.17 0 top
R102  2.2k  [0603-RES]  36.83,75.69 0 top
R103  47K  [0603-RES]  27.69,75.18 90 top
R104  47K  [0603-RES]  30.23,75.18 90 top
R105  2.2k  [0603-RES]  55.12,74.17 0 top
R106  2.2k  [0603-RES]  55.12,75.69 0 top
R107  47K  [0603-RES]  45.97,75.18 90 top
R108  47K  [0603-RES]  48.51,75.18 90 top
R109  2.2k  [0603-RES]  73.41,74.17 0 top
R110  2.2k  [0603-RES]  73.41,75.69 0 top
R111  47K  [0603-RES]  64.26,75.18 90 top
R112  47K  [0603-RES]  66.8,75.18 90 top
R113  2.2k  [0603-RES]  91.69,74.17 0 top
R114  2.2k  [0603-RES]  91.69,75.69 0 top
R115  47K  [0603-RES]  82.55,75.18 90 top
R116  47K  [0603-RES]  85.09,75.18 90 top
R117  2.2k  [0603-RES]  109.98,74.17 0 top
R118  2.2k  [0603-RES]  109.98,75.69 0 top
R119  47K  [0603-RES]  100.84,75.18 90 top
R120  47K  [0603-RES]  103.38,75.18 90 top
R121  2.2k  [0603-RES]  18.54,89.92 0 top
R122  2.2k  [0603-RES]  18.54,91.44 0 top
R123  47K  [0603-RES]  9.4,90.93 90 top
R124  47K  [0603-RES]  11.94,90.93 90 top
R125  2.2k  [0603-RES]  36.83,89.92 0 top
R126  2.2k  [0603-RES]  36.83,91.44 0 top
R127  47K  [0603-RES]  27.69,90.93 90 top
R128  47K  [0603-RES]  30.23,90.93 90 top
R129  2.2k  [0603-RES]  55.12,89.92 0 top
R130  2.2k  [0603-RES]  55.12,91.44 0 top
R131  47K  [0603-RES]  45.97,90.93 90 top
R132  47K  [0603-RES]  48.51,90.93 90 top
R133  2.2k  [0603-RES]  73.41,89.92 0 top
R134  2.2k  [0603-RES]  73.41,91.44 0 top
R135  47K  [0603-RES]  64.26,90.93 90 top
R136  47K  [0603-RES]  66.8,90.93 90 top
R137  2.2k  [0603-RES]  91.69,89.92 0 top
R138  2.2k  [0603-RES]  91.69,91.44 0 top
R139  47K  [0603-RES]  82.55,90.93 90 top
R140  47K  [0603-RES]  85.09,90.93 90 top
R141  2.2k  [0603-RES]  109.98,89.92 0 top
R142  2.2k  [0603-RES]  109.98,91.44 0 top
R143  47K  [0603-RES]  100.84,90.93 90 top
R144  47K  [0603-RES]  103.38,90.93 90 top
SJ1  [PAD-JUMPER-3-NC_BY_PASTE_YES_SILK_FULL_BOX]  21.21,12.19 90 top
SJ2  [PAD-JUMPER-3-NC_BY_PASTE_YES_SILK_FULL_BOX]  39.5,12.19 90 top
SJ3  [PAD-JUMPER-3-NC_BY_PASTE_YES_SILK_FULL_BOX]  57.78,12.19 90 top
SJ4  [PAD-JUMPER-3-NC_BY_PASTE_YES_SILK_FULL_BOX]  76.07,12.19 90 top
SJ5  [PAD-JUMPER-3-NC_BY_PASTE_YES_SILK_FULL_BOX]  94.36,12.19 90 top
SJ6  [PAD-JUMPER-3-NC_BY_PASTE_YES_SILK_FULL_BOX]  112.65,12.19 90 top
SJ7  [PAD-JUMPER-3-NC_BY_PASTE_YES_SILK_FULL_BOX]  21.21,27.94 90 top
SJ8  [PAD-JUMPER-3-NC_BY_PASTE_YES_SILK_FULL_BOX]  39.5,27.94 90 top
SJ9  [PAD-JUMPER-3-NC_BY_PASTE_YES_SILK_FULL_BOX]  57.78,27.94 90 top
SJ10  [PAD-JUMPER-3-NC_BY_PASTE_YES_SILK_FULL_BOX]  76.07,27.94 90 top
SJ11  [PAD-JUMPER-3-NC_BY_PASTE_YES_SILK_FULL_BOX]  94.36,27.94 90 top
SJ12  [PAD-JUMPER-3-NC_BY_PASTE_YES_SILK_FULL_BOX]  112.65,27.94 90 top
SJ13  [PAD-JUMPER-3-NC_BY_PASTE_YES_SILK_FULL_BOX]  21.21,43.69 90 top
SJ14  [PAD-JUMPER-3-NC_BY_PASTE_YES_SILK_FULL_BOX]  39.5,43.69 90 top
SJ15  [PAD-JUMPER-3-NC_BY_PASTE_YES_SILK_FULL_BOX]  57.78,43.69 90 top
SJ16  [PAD-JUMPER-3-NC_BY_PASTE_YES_SILK_FULL_BOX]  76.07,43.69 90 top
SJ17  [PAD-JUMPER-3-NC_BY_PASTE_YES_SILK_FULL_BOX]  94.36,43.69 90 top
SJ18  [PAD-JUMPER-3-NC_BY_PASTE_YES_SILK_FULL_BOX]  112.65,43.69 90 top
SJ19  [PAD-JUMPER-3-NC_BY_PASTE_YES_SILK_FULL_BOX]  21.21,59.44 90 top
SJ20  [PAD-JUMPER-3-NC_BY_PASTE_YES_SILK_FULL_BOX]  39.5,59.44 90 top
SJ21  [PAD-JUMPER-3-NC_BY_PASTE_YES_SILK_FULL_BOX]  57.78,59.44 90 top
SJ22  [PAD-JUMPER-3-NC_BY_PASTE_YES_SILK_FULL_BOX]  76.07,59.44 90 top
SJ23  [PAD-JUMPER-3-NC_BY_PASTE_YES_SILK_FULL_BOX]  94.36,59.44 90 top
SJ24  [PAD-JUMPER-3-NC_BY_PASTE_YES_SILK_FULL_BOX]  112.65,59.44 90 top
SJ25  [PAD-JUMPER-3-NC_BY_PASTE_YES_SILK_FULL_BOX]  21.21,75.18 90 top
SJ26  [PAD-JUMPER-3-NC_BY_PASTE_YES_SILK_FULL_BOX]  39.5,75.18 90 top
SJ27  [PAD-JUMPER-3-NC_BY_PASTE_YES_SILK_FULL_BOX]  57.78,75.18 90 top
SJ28  [PAD-JUMPER-3-NC_BY_PASTE_YES_SILK_FULL_BOX]  76.07,75.18 90 top
SJ29  [PAD-JUMPER-3-NC_BY_PASTE_YES_SILK_FULL_BOX]  94.36,75.18 90 top
SJ30  [PAD-JUMPER-3-NC_BY_PASTE_YES_SILK_FULL_BOX]  112.65,75.18 90 top
SJ31  [PAD-JUMPER-3-NC_BY_PASTE_YES_SILK_FULL_BOX]  21.21,90.93 90 top
SJ32  [PAD-JUMPER-3-NC_BY_PASTE_YES_SILK_FULL_BOX]  39.5,90.93 90 top
SJ33  [PAD-JUMPER-3-NC_BY_PASTE_YES_SILK_FULL_BOX]  57.78,90.93 90 top
SJ34  [PAD-JUMPER-3-NC_BY_PASTE_YES_SILK_FULL_BOX]  76.07,90.93 90 top
SJ35  [PAD-JUMPER-3-NC_BY_PASTE_YES_SILK_FULL_BOX]  94.36,90.93 90 top
SJ36  [PAD-JUMPER-3-NC_BY_PASTE_YES_SILK_FULL_BOX]  112.65,90.93 90 top
STANDOFF1  STAND-OFF  [STAND-OFF]  9.4,17.02 0 top
STANDOFF2  STAND-OFF  [STAND-OFF]  22.1,17.02 0 top
STANDOFF3  STAND-OFF  [STAND-OFF]  27.69,17.02 0 top
STANDOFF4  STAND-OFF  [STAND-OFF]  40.39,17.02 0 top
STANDOFF5  STAND-OFF  [STAND-OFF]  45.97,17.02 0 top
STANDOFF6  STAND-OFF  [STAND-OFF]  58.67,17.02 0 top
STANDOFF7  STAND-OFF  [STAND-OFF]  64.26,17.02 0 top
STANDOFF8  STAND-OFF  [STAND-OFF]  76.96,17.02 0 top
STANDOFF9  STAND-OFF  [STAND-OFF]  82.55,17.02 0 top
STANDOFF10  STAND-OFF  [STAND-OFF]  95.25,17.02 0 top
STANDOFF11  STAND-OFF  [STAND-OFF]  100.84,17.02 0 top
STANDOFF12  STAND-OFF  [STAND-OFF]  113.54,17.02 0 top
STANDOFF13  STAND-OFF  [STAND-OFF]  9.4,32.77 0 top
STANDOFF14  STAND-OFF  [STAND-OFF]  22.1,32.77 0 top
STANDOFF15  STAND-OFF  [STAND-OFF]  27.69,32.77 0 top
STANDOFF16  STAND-OFF  [STAND-OFF]  40.39,32.77 0 top
STANDOFF17  STAND-OFF  [STAND-OFF]  45.97,32.77 0 top
STANDOFF18  STAND-OFF  [STAND-OFF]  58.67,32.77 0 top
STANDOFF19  STAND-OFF  [STAND-OFF]  64.26,32.77 0 top
STANDOFF20  STAND-OFF  [STAND-OFF]  76.96,32.77 0 top
STANDOFF21  STAND-OFF  [STAND-OFF]  82.55,32.77 0 top
STANDOFF22  STAND-OFF  [STAND-OFF]  95.25,32.77 0 top
STANDOFF23  STAND-OFF  [STAND-OFF]  100.84,32.77 0 top
STANDOFF24  STAND-OFF  [STAND-OFF]  113.54,32.77 0 top
STANDOFF25  STAND-OFF  [STAND-OFF]  9.4,48.51 0 top
STANDOFF26  STAND-OFF  [STAND-OFF]  22.1,48.51 0 top
STANDOFF27  STAND-OFF  [STAND-OFF]  27.69,48.51 0 top
STANDOFF28  STAND-OFF  [STAND-OFF]  40.39,48.51 0 top
STANDOFF29  STAND-OFF  [STAND-OFF]  45.97,48.51 0 top
STANDOFF30  STAND-OFF  [STAND-OFF]  58.67,48.51 0 top
STANDOFF31  STAND-OFF  [STAND-OFF]  64.26,48.51 0 top
STANDOFF32  STAND-OFF  [STAND-OFF]  76.96,48.51 0 top
STANDOFF33  STAND-OFF  [STAND-OFF]  82.55,48.51 0 top
STANDOFF34  STAND-OFF  [STAND-OFF]  95.25,48.51 0 top
STANDOFF35  STAND-OFF  [STAND-OFF]  100.84,48.51 0 top
STANDOFF36  STAND-OFF  [STAND-OFF]  113.54,48.51 0 top
STANDOFF37  STAND-OFF  [STAND-OFF]  9.4,64.26 0 top
STANDOFF38  STAND-OFF  [STAND-OFF]  22.1,64.26 0 top
STANDOFF39  STAND-OFF  [STAND-OFF]  27.69,64.26 0 top
STANDOFF40  STAND-OFF  [STAND-OFF]  40.39,64.26 0 top
STANDOFF41  STAND-OFF  [STAND-OFF]  45.97,64.26 0 top
STANDOFF42  STAND-OFF  [STAND-OFF]  58.67,64.26 0 top
STANDOFF43  STAND-OFF  [STAND-OFF]  64.26,64.26 0 top
STANDOFF44  STAND-OFF  [STAND-OFF]  76.96,64.26 0 top
STANDOFF45  STAND-OFF  [STAND-OFF]  82.55,64.26 0 top
STANDOFF46  STAND-OFF  [STAND-OFF]  95.25,64.26 0 top
STANDOFF47  STAND-OFF  [STAND-OFF]  100.84,64.26 0 top
STANDOFF48  STAND-OFF  [STAND-OFF]  113.54,64.26 0 top
STANDOFF49  STAND-OFF  [STAND-OFF]  9.4,80.01 0 top
STANDOFF50  STAND-OFF  [STAND-OFF]  22.1,80.01 0 top
STANDOFF51  STAND-OFF  [STAND-OFF]  27.69,80.01 0 top
STANDOFF52  STAND-OFF  [STAND-OFF]  40.39,80.01 0 top
STANDOFF53  STAND-OFF  [STAND-OFF]  45.97,80.01 0 top
STANDOFF54  STAND-OFF  [STAND-OFF]  58.67,80.01 0 top
STANDOFF55  STAND-OFF  [STAND-OFF]  64.26,80.01 0 top
STANDOFF56  STAND-OFF  [STAND-OFF]  76.96,80.01 0 top
STANDOFF57  STAND-OFF  [STAND-OFF]  82.55,80.01 0 top
STANDOFF58  STAND-OFF  [STAND-OFF]  95.25,80.01 0 top
STANDOFF59  STAND-OFF  [STAND-OFF]  100.84,80.01 0 top
STANDOFF60  STAND-OFF  [STAND-OFF]  113.54,80.01 0 top
STANDOFF61  STAND-OFF  [STAND-OFF]  9.4,95.76 0 top
STANDOFF62  STAND-OFF  [STAND-OFF]  22.1,95.76 0 top
STANDOFF63  STAND-OFF  [STAND-OFF]  27.69,95.76 0 top
STANDOFF64  STAND-OFF  [STAND-OFF]  40.39,95.76 0 top
STANDOFF65  STAND-OFF  [STAND-OFF]  45.97,95.76 0 top
STANDOFF66  STAND-OFF  [STAND-OFF]  58.67,95.76 0 top
STANDOFF67  STAND-OFF  [STAND-OFF]  64.26,95.76 0 top
STANDOFF68  STAND-OFF  [STAND-OFF]  76.96,95.76 0 top
STANDOFF69  STAND-OFF  [STAND-OFF]  82.55,95.76 0 top
STANDOFF70  STAND-OFF  [STAND-OFF]  95.25,95.76 0 top
STANDOFF71  STAND-OFF  [STAND-OFF]  100.84,95.76 0 top
STANDOFF72  STAND-OFF  [STAND-OFF]  113.54,95.76 0 top
U1  VL6180  [VL6180]  15.75,15.24 0 top
U2  VL6180  [VL6180]  34.04,15.24 0 top
U3  VL6180  [VL6180]  52.32,15.24 0 top
U4  VL6180  [VL6180]  70.61,15.24 0 top
U5  VL6180  [VL6180]  88.9,15.24 0 top
U6  VL6180  [VL6180]  107.19,15.24 0 top
U7  VL6180  [VL6180]  15.75,30.99 0 top
U8  VL6180  [VL6180]  34.04,30.99 0 top
U9  VL6180  [VL6180]  52.32,30.99 0 top
U10  VL6180  [VL6180]  70.61,30.99 0 top
U11  VL6180  [VL6180]  88.9,30.99 0 top
U12  VL6180  [VL6180]  107.19,30.99 0 top
U13  VL6180  [VL6180]  15.75,46.74 0 top
U14  VL6180  [VL6180]  34.04,46.74 0 top
U15  VL6180  [VL6180]  52.32,46.74 0 top
U16  VL6180  [VL6180]  70.61,46.74 0 top
U17  VL6180  [VL6180]  88.9,46.74 0 top
U18  VL6180  [VL6180]  107.19,46.74 0 top
U19  VL6180  [VL6180]  15.75,62.48 0 top
U20  VL6180  [VL6180]  34.04,62.48 0 top
U21  VL6180  [VL6180]  52.32,62.48 0 top
U22  VL6180  [VL6180]  70.61,62.48 0 top
U23  VL6180  [VL6180]  88.9,62.48 0 top
U24  VL6180  [VL6180]  107.19,62.48 0 top
U25  VL6180  [VL6180]  15.75,78.23 0 top
U26  VL6180  [VL6180]  34.04,78.23 0 top
U27  VL6180  [VL6180]  52.32,78.23 0 top
U28  VL6180  [VL6180]  70.61,78.23 0 top
U29  VL6180  [VL6180]  88.9,78.23 0 top
U30  VL6180  [VL6180]  107.19,78.23 0 top
U31  VL6180  [VL6180]  15.75,93.98 0 top
U32  VL6180  [VL6180]  34.04,93.98 0 top
U33  VL6180  [VL6180]  52.32,93.98 0 top
U34  VL6180  [VL6180]  70.61,93.98 0 top
U35  VL6180  [VL6180]  88.9,93.98 0 top
U36  VL6180  [VL6180]  107.19,93.98 0 top
U$1  [SFE_LOGO_FLAME_.1]  36.45,13.72 0 top
U$2  [SFE_LOGO_FLAME_.1]  18.16,13.72 0 top
U$3  [SFE_LOGO_FLAME_.1]  54.74,13.72 0 top
U$4  [SFE_LOGO_FLAME_.1]  73.03,13.72 0 top
U$5  [SFE_LOGO_FLAME_.1]  91.31,13.72 0 top
U$6  [SFE_LOGO_FLAME_.1]  109.6,13.72 0 top
U$7  [SFE_LOGO_FLAME_.1]  18.16,29.46 0 top
U$8  [SFE_LOGO_FLAME_.1]  36.45,29.46 0 top
U$9  [SFE_LOGO_FLAME_.1]  54.74,29.46 0 top
U$10  [SFE_LOGO_FLAME_.1]  73.03,29.46 0 top
U$11  [SFE_LOGO_FLAME_.1]  91.31,29.46 0 top
U$12  [SFE_LOGO_FLAME_.1]  109.6,29.46 0 top
U$13  [SFE_LOGO_FLAME_.1]  18.16,45.21 0 top
U$14  [SFE_LOGO_FLAME_.1]  36.45,45.21 0 top
U$15  [SFE_LOGO_FLAME_.1]  54.74,45.21 0 top
U$16  [SFE_LOGO_FLAME_.1]  73.03,45.21 0 top
U$17  [SFE_LOGO_FLAME_.1]  91.31,45.21 0 top
U$18  [SFE_LOGO_FLAME_.1]  109.6,45.21 0 top
U$19  [SFE_LOGO_FLAME_.1]  18.16,60.96 0 top
U$20  [SFE_LOGO_FLAME_.1]  36.45,60.96 0 top
U$21  [SFE_LOGO_FLAME_.1]  54.74,60.96 0 top
U$22  [SFE_LOGO_FLAME_.1]  73.03,60.96 0 top
U$23  [SFE_LOGO_FLAME_.1]  91.31,60.96 0 top
U$24  [SFE_LOGO_FLAME_.1]  109.6,60.96 0 top
U$25  [SFE_LOGO_FLAME_.1]  18.16,76.71 0 top
U$26  [SFE_LOGO_FLAME_.1]  36.45,76.71 0 top
U$27  [SFE_LOGO_FLAME_.1]  54.74,76.71 0 top
U$28  [SFE_LOGO_FLAME_.1]  73.03,76.71 0 top
U$29  [SFE_LOGO_FLAME_.1]  91.31,76.71 0 top
U$30  [SFE_LOGO_FLAME_.1]  109.6,76.71 0 top
U$31  [SFE_LOGO_FLAME_.1]  18.16,92.46 0 top
U$32  [SFE_LOGO_FLAME_.1]  36.45,92.46 0 top
U$33  [SFE_LOGO_FLAME_.1]  54.74,92.46 0 top
U$34  [SFE_LOGO_FLAME_.1]  73.03,92.46 0 top
U$35  [SFE_LOGO_FLAME_.1]  91.31,92.46 0 top
U$36  [SFE_LOGO_FLAME_.1]  109.6,92.46 0 top

## Library data of the parts
C1 C3 C5 C7 C9 C11 C13 C15 C17 C19 C21 C23 C25 C27 C29 C31 C33 C35 C37 C39 C41 C43 C45 C47 C49 C51 C53 C55 C57 C59 C61 C63 C65 C67 C69 C71 = SparkFun-Capacitors; PROD_ID: CAP-08280
C2 C4 C6 C8 C10 C12 C14 C16 C18 C20 C22 C24 C26 C28 C30 C32 C34 C36 C38 C40 C42 C44 C46 C48 C50 C52 C54 C56 C58 C60 C62 C64 C66 C68 C70 C72 = SparkFun-Capacitors; PROD_ID: CAP-00810
E$1 = SparkFun-Retired
E$4 E$6 FID1-FID72 LOGO1-LOGO72 U$1-U$36 = SparkFun-Aesthetics
JP1-JP36 = SparkFun-Connectors
R1 R4 R7 R8 R11 R12 R15 R16 R19 R20 R23 R24 R27 R28 R31 R32 R35 R36 R39 R40 R43 R44 R47 R48 R51 R52 R55 R56 R59 R60 R63 R64 R67 R68 R71 R72 R75 R76 R79 R80 R83 R84 R87 R88 R91 R92 R95 R96 R99 R100 R103 R104 R107 R108 R111 R112 R115 R116 R119 R120 R123 R124 R127 R128 R131 R132 R135 R136 R139 R140 R143 R144 = SparkFun-Resistors; PROD_ID: RES-07871
R2 R3 R5 R6 R9 R10 R13 R14 R17 R18 R21 R22 R25 R26 R29 R30 R33 R34 R37 R38 R41 R42 R45 R46 R49 R50 R53 R54 R57 R58 R61 R62 R65 R66 R69 R70 R73 R74 R77 R78 R81 R82 R85 R86 R89 R90 R93 R94 R97 R98 R101 R102 R105 R106 R109 R110 R113 R114 R117 R118 R121 R122 R125 R126 R129 R130 R133 R134 R137 R138 R141 R142 = SparkFun-Resistors; PROD_ID: RES-08272
SJ1-SJ36 = SparkFun-Passives
STANDOFF1-STANDOFF72 = SparkFun-Electromechanical
U1-U36 = VL6180; PROD_ID: IC-12007

## Nets
2.8V: C1.1 C2.1 JP1.2 R1.2 R4.2 SJ1.2 U1.8 U1.10
2.8V1: C3.1 C4.1 JP2.2 R7.2 R8.2 SJ2.2 U2.8 U2.10
2.8V2: C5.1 C6.1 JP3.2 R11.2 R12.2 SJ3.2 U3.8 U3.10
2.8V3: C7.1 C8.1 JP4.2 R15.2 R16.2 SJ4.2 U4.8 U4.10
2.8V4: C9.1 C10.1 JP5.2 R19.2 R20.2 SJ5.2 U5.8 U5.10
2.8V5: C11.1 C12.1 JP6.2 R23.2 R24.2 SJ6.2 U6.8 U6.10
2.8V6: C13.1 C14.1 JP7.2 R27.2 R28.2 SJ7.2 U7.8 U7.10
2.8V7: C15.1 C16.1 JP8.2 R31.2 R32.2 SJ8.2 U8.8 U8.10
2.8V8: C17.1 C18.1 JP9.2 R35.2 R36.2 SJ9.2 U9.8 U9.10
2.8V9: C19.1 C20.1 JP10.2 R39.2 R40.2 SJ10.2 U10.8 U10.10
2.8V10: C21.1 C22.1 JP11.2 R43.2 R44.2 SJ11.2 U11.8 U11.10
2.8V11: C23.1 C24.1 JP12.2 R47.2 R48.2 SJ12.2 U12.8 U12.10
2.8V12: C25.1 C26.1 JP13.2 R51.2 R52.2 SJ13.2 U13.8 U13.10
2.8V13: C27.1 C28.1 JP14.2 R55.2 R56.2 SJ14.2 U14.8 U14.10
2.8V14: C29.1 C30.1 JP15.2 R59.2 R60.2 SJ15.2 U15.8 U15.10
2.8V15: C31.1 C32.1 JP16.2 R63.2 R64.2 SJ16.2 U16.8 U16.10
2.8V16: C33.1 C34.1 JP17.2 R67.2 R68.2 SJ17.2 U17.8 U17.10
2.8V17: C35.1 C36.1 JP18.2 R71.2 R72.2 SJ18.2 U18.8 U18.10
2.8V18: C37.1 C38.1 JP19.2 R75.2 R76.2 SJ19.2 U19.8 U19.10
2.8V19: C39.1 C40.1 JP20.2 R79.2 R80.2 SJ20.2 U20.8 U20.10
2.8V20: C41.1 C42.1 JP21.2 R83.2 R84.2 SJ21.2 U21.8 U21.10
2.8V21: C43.1 C44.1 JP22.2 R87.2 R88.2 SJ22.2 U22.8 U22.10
2.8V22: C45.1 C46.1 JP23.2 R91.2 R92.2 SJ23.2 U23.8 U23.10
2.8V23: C47.1 C48.1 JP24.2 R95.2 R96.2 SJ24.2 U24.8 U24.10
2.8V24: C49.1 C50.1 JP25.2 R99.2 R100.2 SJ25.2 U25.8 U25.10
2.8V25: C51.1 C52.1 JP26.2 R103.2 R104.2 SJ26.2 U26.8 U26.10
2.8V26: C53.1 C54.1 JP27.2 R107.2 R108.2 SJ27.2 U27.8 U27.10
2.8V27: C55.1 C56.1 JP28.2 R111.2 R112.2 SJ28.2 U28.8 U28.10
2.8V28: C57.1 C58.1 JP29.2 R115.2 R116.2 SJ29.2 U29.8 U29.10
2.8V29: C59.1 C60.1 JP30.2 R119.2 R120.2 SJ30.2 U30.8 U30.10
2.8V30: C61.1 C62.1 JP31.2 R123.2 R124.2 SJ31.2 U31.8 U31.10
2.8V31: C63.1 C64.1 JP32.2 R127.2 R128.2 SJ32.2 U32.8 U32.10
2.8V32: C65.1 C66.1 JP33.2 R131.2 R132.2 SJ33.2 U33.8 U33.10
2.8V33: C67.1 C68.1 JP34.2 R135.2 R136.2 SJ34.2 U34.8 U34.10
2.8V34: C69.1 C70.1 JP35.2 R139.2 R140.2 SJ35.2 U35.8 U35.10
2.8V35: C71.1 C72.1 JP36.2 R143.2 R144.2 SJ36.2 U36.8 U36.10
GND: C1.2 C2.2 JP1.1 U1.9 U1.12
GND1: C3.2 C4.2 JP2.1 U2.9 U2.12
GND2: C5.2 C6.2 JP3.1 U3.9 U3.12
GND3: C7.2 C8.2 JP4.1 U4.9 U4.12
GND4: C9.2 C10.2 JP5.1 U5.9 U5.12
GND5: C11.2 C12.2 JP6.1 U6.9 U6.12
GND6: C13.2 C14.2 JP7.1 U7.9 U7.12
GND7: C15.2 C16.2 JP8.1 U8.9 U8.12
GND8: C17.2 C18.2 JP9.1 U9.9 U9.12
GND9: C19.2 C20.2 JP10.1 U10.9 U10.12
GND10: C21.2 C22.2 JP11.1 U11.9 U11.12
GND11: C23.2 C24.2 JP12.1 U12.9 U12.12
GND12: C25.2 C26.2 JP13.1 U13.9 U13.12
GND13: C27.2 C28.2 JP14.1 U14.9 U14.12
GND14: C29.2 C30.2 JP15.1 U15.9 U15.12
GND15: C31.2 C32.2 JP16.1 U16.9 U16.12
GND16: C33.2 C34.2 JP17.1 U17.9 U17.12
GND17: C35.2 C36.2 JP18.1 U18.9 U18.12
GND18: C37.2 C38.2 JP19.1 U19.9 U19.12
GND19: C39.2 C40.2 JP20.1 U20.9 U20.12
GND20: C41.2 C42.2 JP21.1 U21.9 U21.12
GND21: C43.2 C44.2 JP22.1 U22.9 U22.12
GND22: C45.2 C46.2 JP23.1 U23.9 U23.12
GND23: C47.2 C48.2 JP24.1 U24.9 U24.12
GND24: C49.2 C50.2 JP25.1 U25.9 U25.12
GND25: C51.2 C52.2 JP26.1 U26.9 U26.12
GND26: C53.2 C54.2 JP27.1 U27.9 U27.12
GND27: C55.2 C56.2 JP28.1 U28.9 U28.12
GND28: C57.2 C58.2 JP29.1 U29.9 U29.12
GND29: C59.2 C60.2 JP30.1 U30.9 U30.12
GND30: C61.2 C62.2 JP31.1 U31.9 U31.12
GND31: C63.2 C64.2 JP32.1 U32.9 U32.12
GND32: C65.2 C66.2 JP33.1 U33.9 U33.12
GND33: C67.2 C68.2 JP34.1 U34.9 U34.12
GND34: C69.2 C70.2 JP35.1 U35.9 U35.12
GND35: C71.2 C72.2 JP36.1 U36.9 U36.12
GPIO0: JP1.5 R1.1 U1.4
GPIO1: JP1.6 R4.1 U1.1
GPIO2: JP2.5 R8.1 U2.4
GPIO3: JP2.6 R7.1 U2.1
GPIO4: JP3.5 R12.1 U3.4
GPIO5: JP3.6 R11.1 U3.1
GPIO6: JP4.5 R16.1 U4.4
GPIO7: JP4.6 R15.1 U4.1
GPIO8: JP5.5 R20.1 U5.4
GPIO9: JP5.6 R19.1 U5.1
GPIO10: JP6.5 R24.1 U6.4
GPIO11: JP6.6 R23.1 U6.1
GPIO12: JP7.5 R28.1 U7.4
GPIO13: JP7.6 R27.1 U7.1
GPIO14: JP8.5 R32.1 U8.4
GPIO15: JP8.6 R31.1 U8.1
GPIO16: JP9.5 R36.1 U9.4
GPIO17: JP9.6 R35.1 U9.1
GPIO18: JP10.5 R40.1 U10.4
GPIO19: JP10.6 R39.1 U10.1
GPIO20: JP11.5 R44.1 U11.4
GPIO21: JP11.6 R43.1 U11.1
GPIO22: JP12.5 R48.1 U12.4
GPIO23: JP12.6 R47.1 U12.1
GPIO24: JP13.5 R52.1 U13.4
GPIO25: JP13.6 R51.1 U13.1
GPIO26: JP14.5 R56.1 U14.4
GPIO27: JP14.6 R55.1 U14.1
GPIO28: JP15.5 R60.1 U15.4
GPIO29: JP15.6 R59.1 U15.1
GPIO30: JP16.5 R64.1 U16.4
GPIO31: JP16.6 R63.1 U16.1
GPIO32: JP17.5 R68.1 U17.4
GPIO33: JP17.6 R67.1 U17.1
GPIO34: JP18.5 R72.1 U18.4
GPIO35: JP18.6 R71.1 U18.1
GPIO36: JP19.5 R76.1 U19.4
GPIO37: JP19.6 R75.1 U19.1
GPIO38: JP20.5 R80.1 U20.4
GPIO39: JP20.6 R79.1 U20.1
GPIO40: JP21.5 R84.1 U21.4
GPIO41: JP21.6 R83.1 U21.1
GPIO42: JP22.5 R88.1 U22.4
GPIO43: JP22.6 R87.1 U22.1
GPIO44: JP23.5 R92.1 U23.4
GPIO45: JP23.6 R91.1 U23.1
GPIO46: JP24.5 R96.1 U24.4
GPIO47: JP24.6 R95.1 U24.1
GPIO48: JP25.5 R100.1 U25.4
GPIO49: JP25.6 R99.1 U25.1
GPIO50: JP26.5 R104.1 U26.4
GPIO51: JP26.6 R103.1 U26.1
GPIO52: JP27.5 R108.1 U27.4
GPIO53: JP27.6 R107.1 U27.1
GPIO54: JP28.5 R112.1 U28.4
GPIO55: JP28.6 R111.1 U28.1
GPIO56: JP29.5 R116.1 U29.4
GPIO57: JP29.6 R115.1 U29.1
GPIO58: JP30.5 R120.1 U30.4
GPIO59: JP30.6 R119.1 U30.1
GPIO60: JP31.5 R124.1 U31.4
GPIO61: JP31.6 R123.1 U31.1
GPIO62: JP32.5 R128.1 U32.4
GPIO63: JP32.6 R127.1 U32.1
GPIO64: JP33.5 R132.1 U33.4
GPIO65: JP33.6 R131.1 U33.1
GPIO66: JP34.5 R136.1 U34.4
GPIO67: JP34.6 R135.1 U34.1
GPIO68: JP35.5 R140.1 U35.4
GPIO69: JP35.6 R139.1 U35.1
GPIO70: JP36.5 R144.1 U36.4
GPIO71: JP36.6 R143.1 U36.1
N$1: R2.2 SJ1.1
N$2: R3.2 SJ1.3
N$3: R5.2 SJ2.1
N$4: R6.2 SJ2.3
N$5: R9.2 SJ3.1
N$6: R10.2 SJ3.3
N$7: R13.2 SJ4.1
N$8: R14.2 SJ4.3
N$9: R17.2 SJ5.1
N$10: R18.2 SJ5.3
N$11: R21.2 SJ6.1
N$12: R22.2 SJ6.3
N$13: R25.2 SJ7.1
N$14: R26.2 SJ7.3
N$15: R29.2 SJ8.1
N$16: R30.2 SJ8.3
N$17: R33.2 SJ9.1
N$18: R34.2 SJ9.3
N$19: R37.2 SJ10.1
N$20: R38.2 SJ10.3
N$21: R41.2 SJ11.1
N$22: R42.2 SJ11.3
N$23: R45.2 SJ12.1
N$24: R46.2 SJ12.3
N$25: R49.2 SJ13.1
N$26: R50.2 SJ13.3
N$27: R53.2 SJ14.1
N$28: R54.2 SJ14.3
N$29: R57.2 SJ15.1
N$30: R58.2 SJ15.3
N$31: R61.2 SJ16.1
N$32: R62.2 SJ16.3
N$33: R65.2 SJ17.1
N$34: R66.2 SJ17.3
N$35: R69.2 SJ18.1
N$36: R70.2 SJ18.3
N$37: R73.2 SJ19.1
N$38: R74.2 SJ19.3
N$39: R77.2 SJ20.1
N$40: R78.2 SJ20.3
N$41: R81.2 SJ21.1
N$42: R82.2 SJ21.3
N$43: R85.2 SJ22.1
N$44: R86.2 SJ22.3
N$45: R89.2 SJ23.1
N$46: R90.2 SJ23.3
N$47: R93.2 SJ24.1
N$48: R94.2 SJ24.3
N$49: R97.2 SJ25.1
N$50: R98.2 SJ25.3
N$51: R101.2 SJ26.1
N$52: R102.2 SJ26.3
N$53: R105.2 SJ27.1
N$54: R106.2 SJ27.3
N$55: R109.2 SJ28.1
N$56: R110.2 SJ28.3
N$57: R113.2 SJ29.1
N$58: R114.2 SJ29.3
N$59: R117.2 SJ30.1
N$60: R118.2 SJ30.3
N$61: R121.2 SJ31.1
N$62: R122.2 SJ31.3
N$63: R125.2 SJ32.1
N$64: R126.2 SJ32.3
N$65: R129.2 SJ33.1
N$66: R130.2 SJ33.3
N$67: R133.2 SJ34.1
N$68: R134.2 SJ34.3
N$69: R137.2 SJ35.1
N$70: R138.2 SJ35.3
N$71: R141.2 SJ36.1
N$72: R142.2 SJ36.3
SCL: JP1.4 R2.1 U1.5
SCL1: JP2.4 R5.1 U2.5
SCL2: JP3.4 R9.1 U3.5
SCL3: JP4.4 R13.1 U4.5
SCL4: JP5.4 R17.1 U5.5
SCL5: JP6.4 R21.1 U6.5
SCL6: JP7.4 R25.1 U7.5
SCL7: JP8.4 R29.1 U8.5
SCL8: JP9.4 R33.1 U9.5
SCL9: JP10.4 R37.1 U10.5
SCL10: JP11.4 R41.1 U11.5
SCL11: JP12.4 R45.1 U12.5
SCL12: JP13.4 R49.1 U13.5
SCL13: JP14.4 R53.1 U14.5
SCL14: JP15.4 R57.1 U15.5
SCL15: JP16.4 R61.1 U16.5
SCL16: JP17.4 R65.1 U17.5
SCL17: JP18.4 R69.1 U18.5
SCL18: JP19.4 R73.1 U19.5
SCL19: JP20.4 R77.1 U20.5
SCL20: JP21.4 R81.1 U21.5
SCL21: JP22.4 R85.1 U22.5
SCL22: JP23.4 R89.1 U23.5
SCL23: JP24.4 R93.1 U24.5
SCL24: JP25.4 R97.1 U25.5
SCL25: JP26.4 R101.1 U26.5
SCL26: JP27.4 R105.1 U27.5
SCL27: JP28.4 R109.1 U28.5
SCL28: JP29.4 R113.1 U29.5
SCL29: JP30.4 R117.1 U30.5
SCL30: JP31.4 R121.1 U31.5
SCL31: JP32.4 R125.1 U32.5
SCL32: JP33.4 R129.1 U33.5
SCL33: JP34.4 R133.1 U34.5
SCL34: JP35.4 R137.1 U35.5
SCL35: JP36.4 R141.1 U36.5
SDA: JP1.3 R3.1 U1.6
SDA1: JP2.3 R6.1 U2.6
SDA2: JP3.3 R10.1 U3.6
SDA3: JP4.3 R14.1 U4.6
SDA4: JP5.3 R18.1 U5.6
SDA5: JP6.3 R22.1 U6.6
SDA6: JP7.3 R26.1 U7.6
SDA7: JP8.3 R30.1 U8.6
SDA8: JP9.3 R34.1 U9.6
SDA9: JP10.3 R38.1 U10.6
SDA10: JP11.3 R42.1 U11.6
SDA11: JP12.3 R46.1 U12.6
SDA12: JP13.3 R50.1 U13.6
SDA13: JP14.3 R54.1 U14.6
SDA14: JP15.3 R58.1 U15.6
SDA15: JP16.3 R62.1 U16.6
SDA16: JP17.3 R66.1 U17.6
SDA17: JP18.3 R70.1 U18.6
SDA18: JP19.3 R74.1 U19.6
SDA19: JP20.3 R78.1 U20.6
SDA20: JP21.3 R82.1 U21.6
SDA21: JP22.3 R86.1 U22.6
SDA22: JP23.3 R90.1 U23.6
SDA23: JP24.3 R94.1 U24.6
SDA24: JP25.3 R98.1 U25.6
SDA25: JP26.3 R102.1 U26.6
SDA26: JP27.3 R106.1 U27.6
SDA27: JP28.3 R110.1 U28.6
SDA28: JP29.3 R114.1 U29.6
SDA29: JP30.3 R118.1 U30.6
SDA30: JP31.3 R122.1 U31.6
SDA31: JP32.3 R126.1 U32.6
SDA32: JP33.3 R130.1 U33.6
SDA33: JP34.3 R134.1 U34.6
SDA34: JP35.3 R138.1 U35.6
SDA35: JP36.3 R142.1 U36.6